# Altium PCB IRPCB1.PcbDoc
Units mil, origin at the board's own origin, x right, y up, seen from the top; angles counter-clockwise.
Board outline 6000 x 4000 mil, 2 copper layers (Top Layer, Bottom Layer); 9 components, 7 nets, 26 pads, 0 vias.
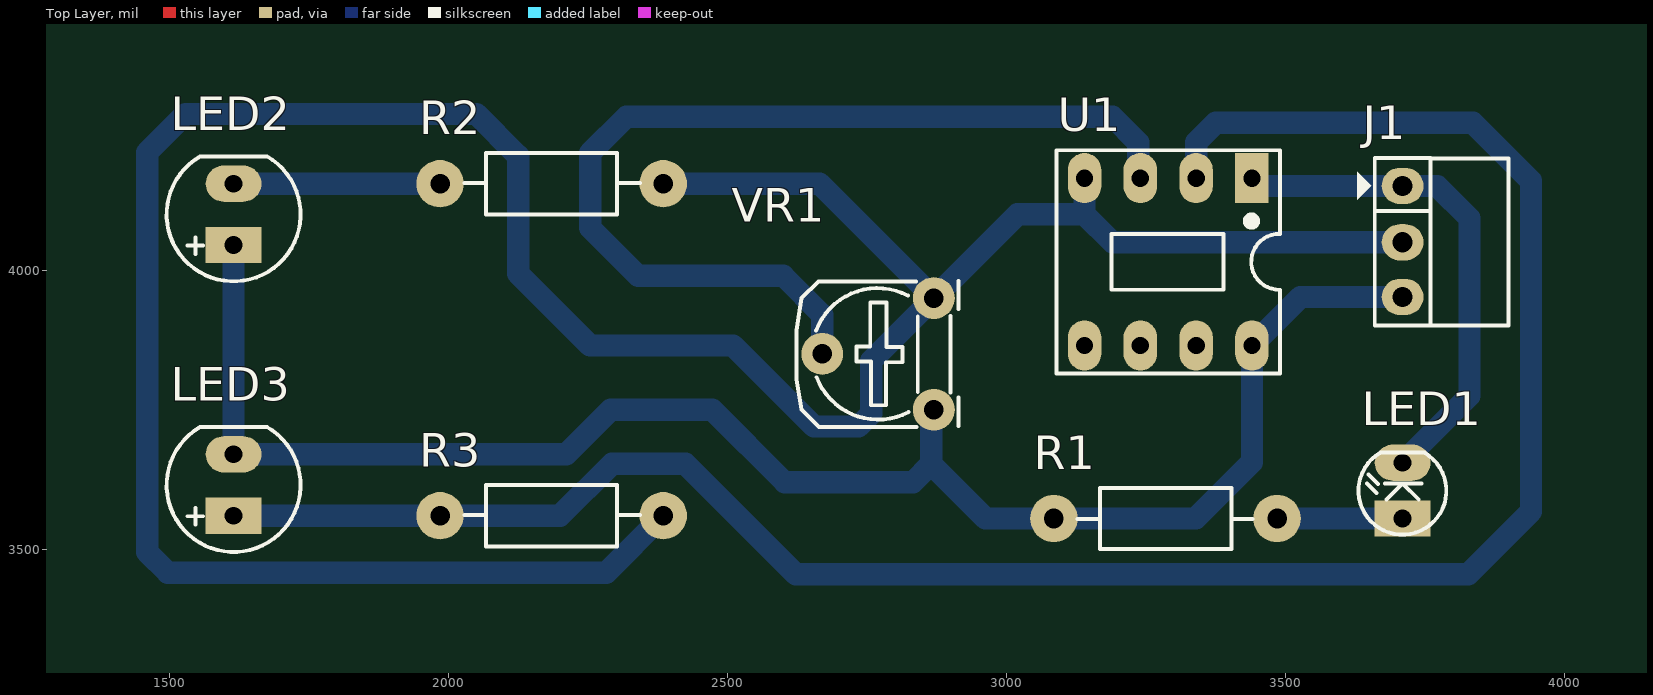
[diagram p0: Top Layer view]
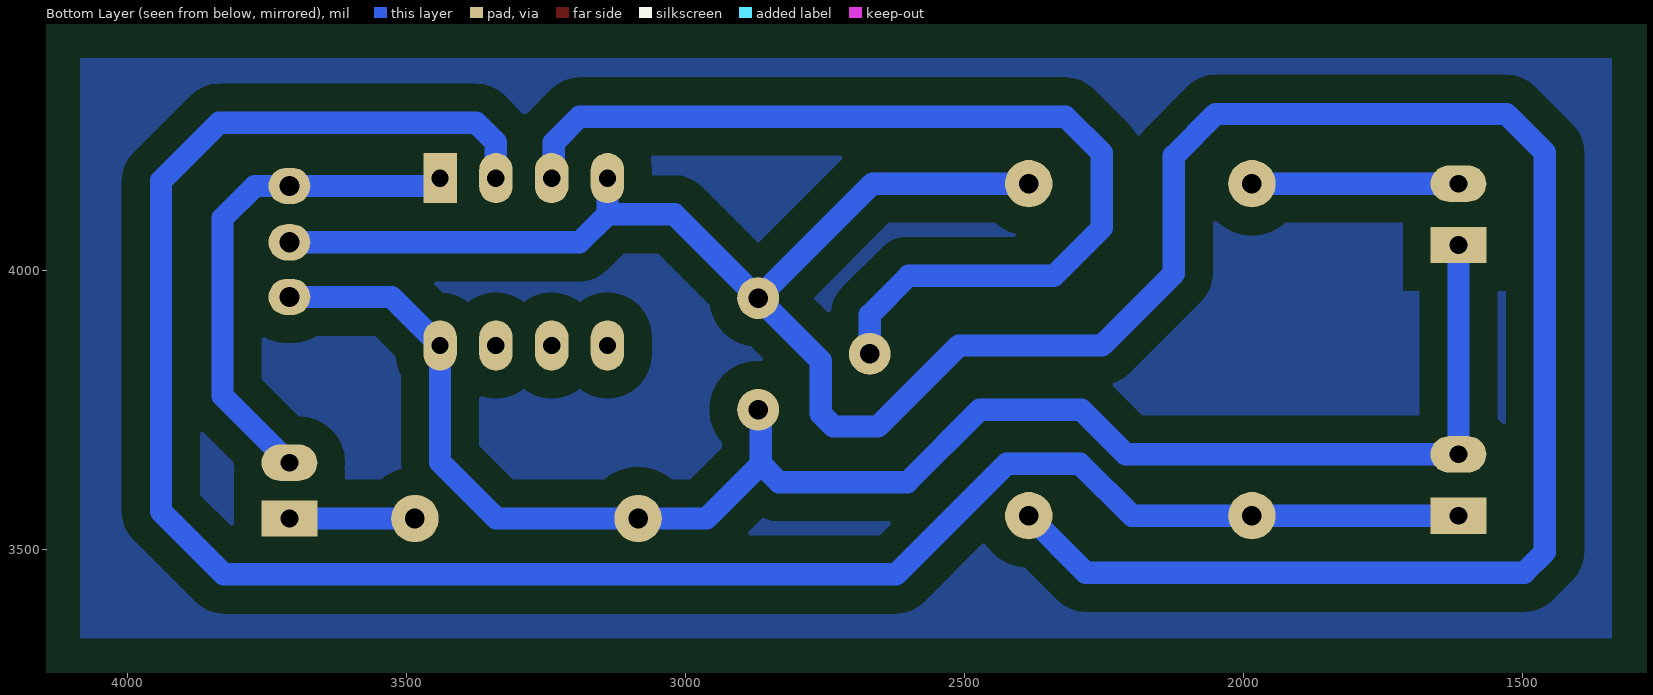
[diagram p1: Bottom Layer view, seen from below]
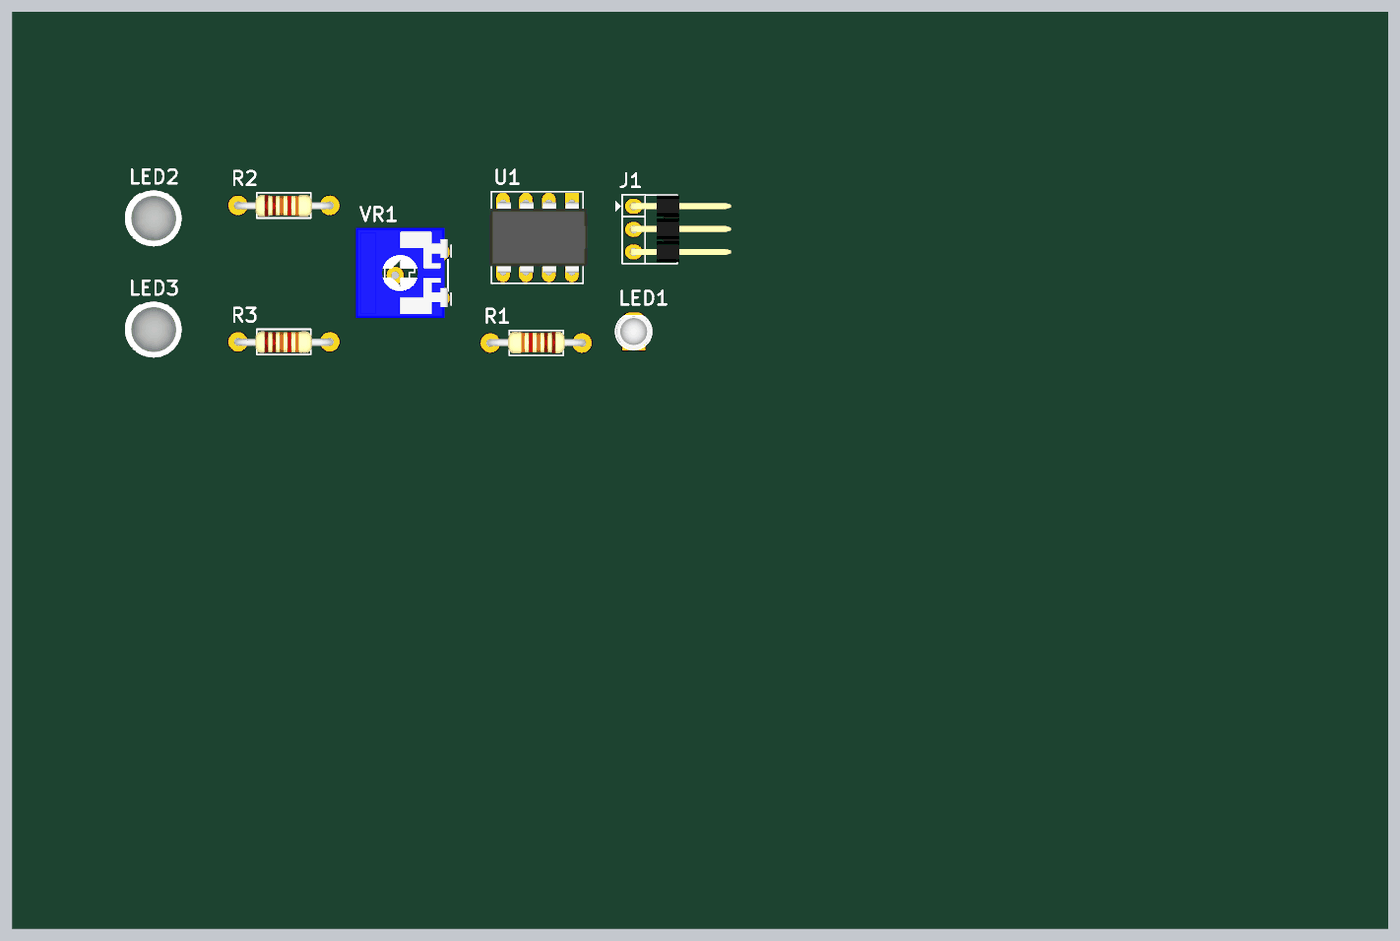
[diagram p2: 3D render of the assembled board from above, using the file's embedded part models]

## Layer stack, top to bottom
Top Solder: solder mask 0.4, Solder Resist, Dk 3.5
Top Layer: signal copper 1.4
Dielectric 1: dielectric 12.6, FR-4, Dk 4.8
Bottom Layer: signal copper 1.4
Bottom Solder: solder mask 0.4, Solder Resist, Dk 3.5

## Board outline
1000,1000 7000,1000 7000,5000 1000,5000

## Design rules (kind name [scope] priority, off if disabled: settings)
Clearance [All] p1: gap=50 ignorepadtopadclearanceinfootprint=FALSE
PolygonConnect [All] p1: connectstyle=Relief reliefconductorwidth=10 reliefentries=4 polygonreliefangle="90 Angle" airgapwidth=10
RoutingLayers [All] p1: top layer_v5=FALSE bottom layer_v5=TRUE
RoutingVias [All] p1: holewidth=28 width=50 viastyle="Through Hole" minholewidth=28 minwidth=50 maxholewidth=28 maxwidth=50
SolderMaskExpansion [All] p1: expansion=4
UnRoutedNet [All] p1: checkbadconnections=TRUE
Width [All] p1: maxlimit=50 minlimit=40 preferedwidth=40
28 further rules are at their usual default settings.

## Components (designator, comment, footprint, x,y, rotation, side; value= is the part's Value field where it differs from the comment)
J1 "Jumper 3" JP3H 3710,4151 r270 top value=J3
LED1 "LED" LED-3 3710,3555 r90 top value="LED 3 ly Single Colour"
LED2 "LED" LED-5-WHITE 1615,4100 r90 top value="LED 3 ly Single Colour"
LED3 "LED" LED-5-WHITE 1615,3615 r90 top value="LED 3 ly Single Colour"
R1 "1k" R1/2W 3085,3555 r0 top value="R1/4W - 1K"
R2 "1k" R1/2W 2385,4155 r180 top value="R1/4W - 1K"
R3 "1k" R1/2W 2385,3560 r180 top value="R1/4W - 1K"
U1 "LM393" DIP8 3295,4015 r180 top
VR1 "10K" VR 2870,3750 r90 top value="VR 10K"

## Footprints (in the part's own frame and the unit in brackets; to place one, negate y for a bottom-side part, rotate by r counter-clockwise, add the part's x,y. Pads: shape width x height; smd on the part's side, far side on the other; paste and mask are expansions set on the pad)
DIP8 [mil] "DIP, 8-Leads, Row Spacing 7.62mm, Pitch 2.54mm, Body 9.91x6.73mm"
  rect 60x90 hole 31: 1(-145,-150)
  oval 60x90 hole 31: 2(-45,-150) 3(55,-150) 4(155,-150) 5(155,150) 6(55,150) 7(-45,150) 8(-145,150)
  silkscreen extent -195,-200 205,200, body extent -213,-153 213,153, height 177
JP3H [mil]
  oval 65x75 hole 36: 1(0,0) 2(101,0) 3(199,0)
  silkscreen extent -50,-81 250,190, body extent -47,-15 245,424, height 99
LED-3 [mil] "LED 2 PIN, 3ly Only colour"
  rect 65x100 hole 32: 1(0,0)
  oval 65x100 hole 32: 2(100,0)
  silkscreen extent -29,-78 118,79, body extent -25,-75 113,75, height 217
LED-5-WHITE [mil] "LED 2 PIN, 5 ly , Only colour, pin to pin 110mil"
  rect 65x100 hole 32: 1(-55,0)
  oval 65x100 hole 32: 2(55,0)
  silkscreen extent -120,-120 104,120, body extent -124,-125 121,120, height 340
R1/2W [mil] "R 1/2W, 2 pin, 300mil"
  round 85 hole 35: 1(0,0) 2(400,0)
  silkscreen extent 42,-55 356,55, body extent -12,-45 414,49, height 91
VR [mil] "Resistor Variable"
  round 75 hole 35: 1(0,0) 2(100,200) 3(200,0)
  silkscreen extent -31,-44 231,246, body extent -87,-30 307,372, height 165

## Part data
J1: library part JP3
LED1 LED2 LED3: "LED Single colour Green and Red"
R1 R2 R3: library part R1/4W, "Resistor 1/4W"
U1: "IC DUAL COMPARATOR"
VR1: library part VR, "Var Resistor"

## Nets (pads, with @x,y where several pads share a name; then routed paths per layer and width w, separated by ;. In a path a pad name is that pad's centre, name@x,y a point inside that pad or via, vN(x,y) a via of type N, cw(c..) or ccw(c..) an arc to the next point about the centre after c; other vN are vias at no path point)
GND: J1.2 R2.1 R3.1 U1.4 VR1.3 | length 5201.4
  Bottom Layer w40: R3.1 2283,3458 1497,3458 1460,3495 1460,4211 1529,4280 2050,4280 2125,4205 2125,3994 2254,3865 2510.12,3865 2655.12,3720 2735,3720 2757.5,3742.5 2757.5,3837.5 VR1.3 ; R2.1 2665,4155 VR1.3 ; U1.4 3140,4100 ; J1.2 3190,4050 3140,4100 ; VR1.3 3020,4100 3140,4100
NetJ1_1: J1.1 LED1.2 U1.1 | length 922
  Bottom Layer w40: U1.1 3440,4151 J1.1 3772,4151 3830,4093 3830,3775 3732.28,3677.28 3732.28,3666.55 3720.74,3655 LED1.2
NetLED1_1: LED1.1 R1.2 | length 225
  Bottom Layer w40: R1.2 LED1.1
NetLED2_2: LED2.2 R2.2 | length 370
  Bottom Layer w40: LED2.2 R2.2
NetLED3_1: LED3.1 R3.2 U1.2 | length 3806.2
  Bottom Layer w40: LED3.1 R3.2 2200,3560 2293,3653 2425,3653 2623,3455 3827.5,3455 3940,3567.5 3940,4160 3836,4264 3375,4264 3340,4229 U1.2
NetU1_3: U1.3 VR1.2 | length 1778.3
  Bottom Layer w40: VR1.2 2670,3920 2600,3990 2340,3990 2254,4076 2254,4210 2319,4275 3190,4275 3236.17,4228.83 3236.17,4168.83 U1.3
VCC: J1.3 LED2.1 LED3.2 R1.1 U1.8 VR1.1 | length 2997.3
  Bottom Layer w40: LED2.1 LED3.2 2211,3670 2291,3750 2472.72,3750 2602.72,3620 2832.5,3620 2865,3652.5 ; VR1.1 2865,3745 2865,3652.5 ; J1.3 3527,3952 U1.8 3440,3656 3339,3555 R1.1 2962.5,3555 2865,3652.5
pads on no net: U1.5 U1.6 U1.7

## Polygon pours and split planes (outlines as drawn)
no net on Bottom Layer (solid, pour order 2): 1410,4425
no net on Bottom Layer (solid, pour order 0): 4085,4380 4085,3340 1340,3340 1340,4380